# Altium PCB battery_board.PcbDoc
Units mil, origin at the board's own origin, x right, y up, seen from the top; angles counter-clockwise.
Board outline 4133.86 x 1811.02 mil, 2 copper layers (Top Layer, Bottom Layer); 6 components, 4 nets, 14 pads, 0 vias.
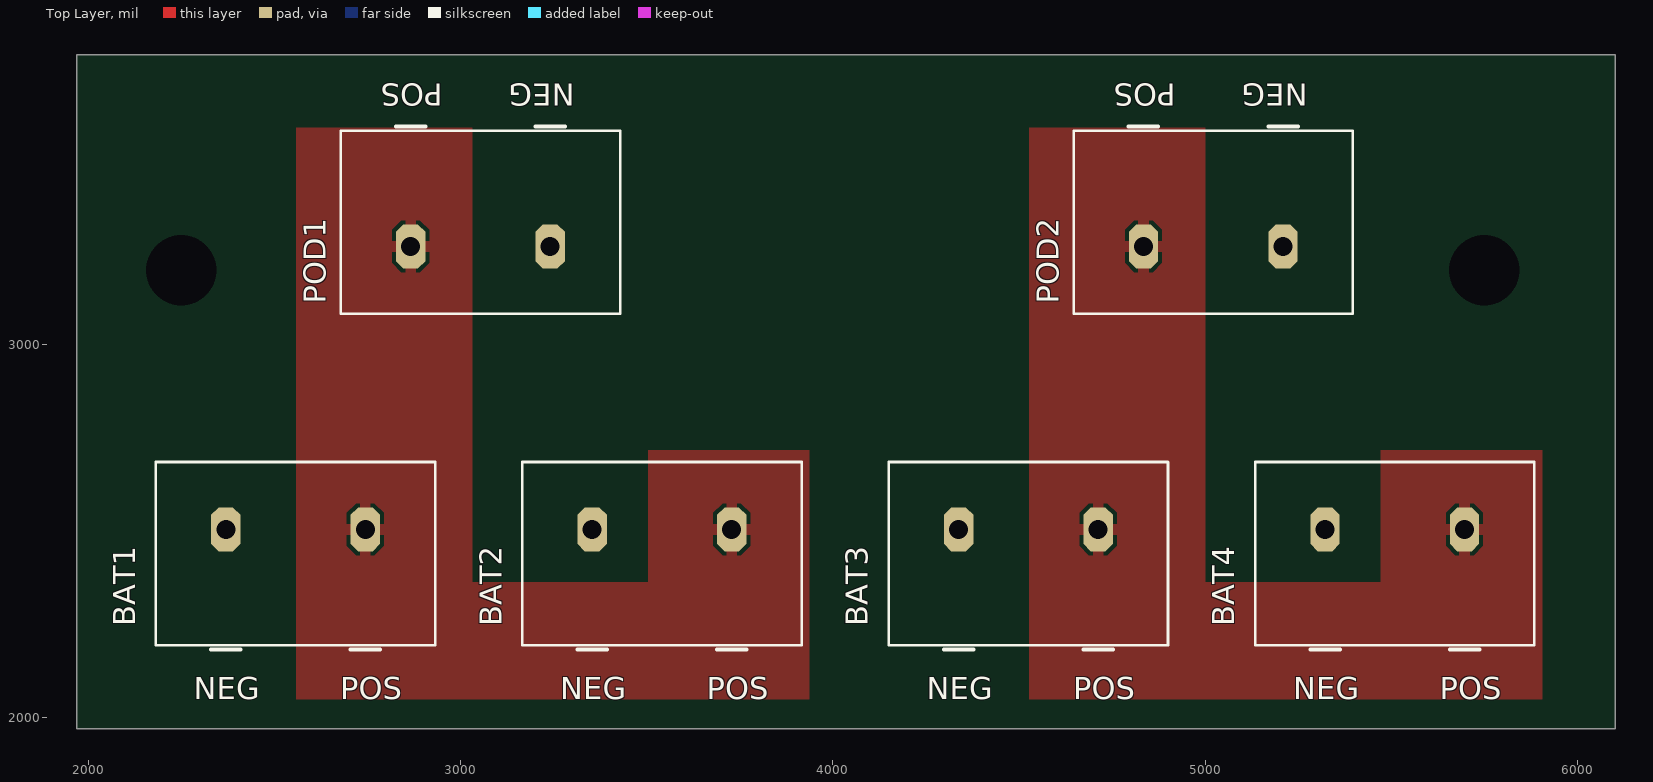
[diagram p0: Top Layer view]
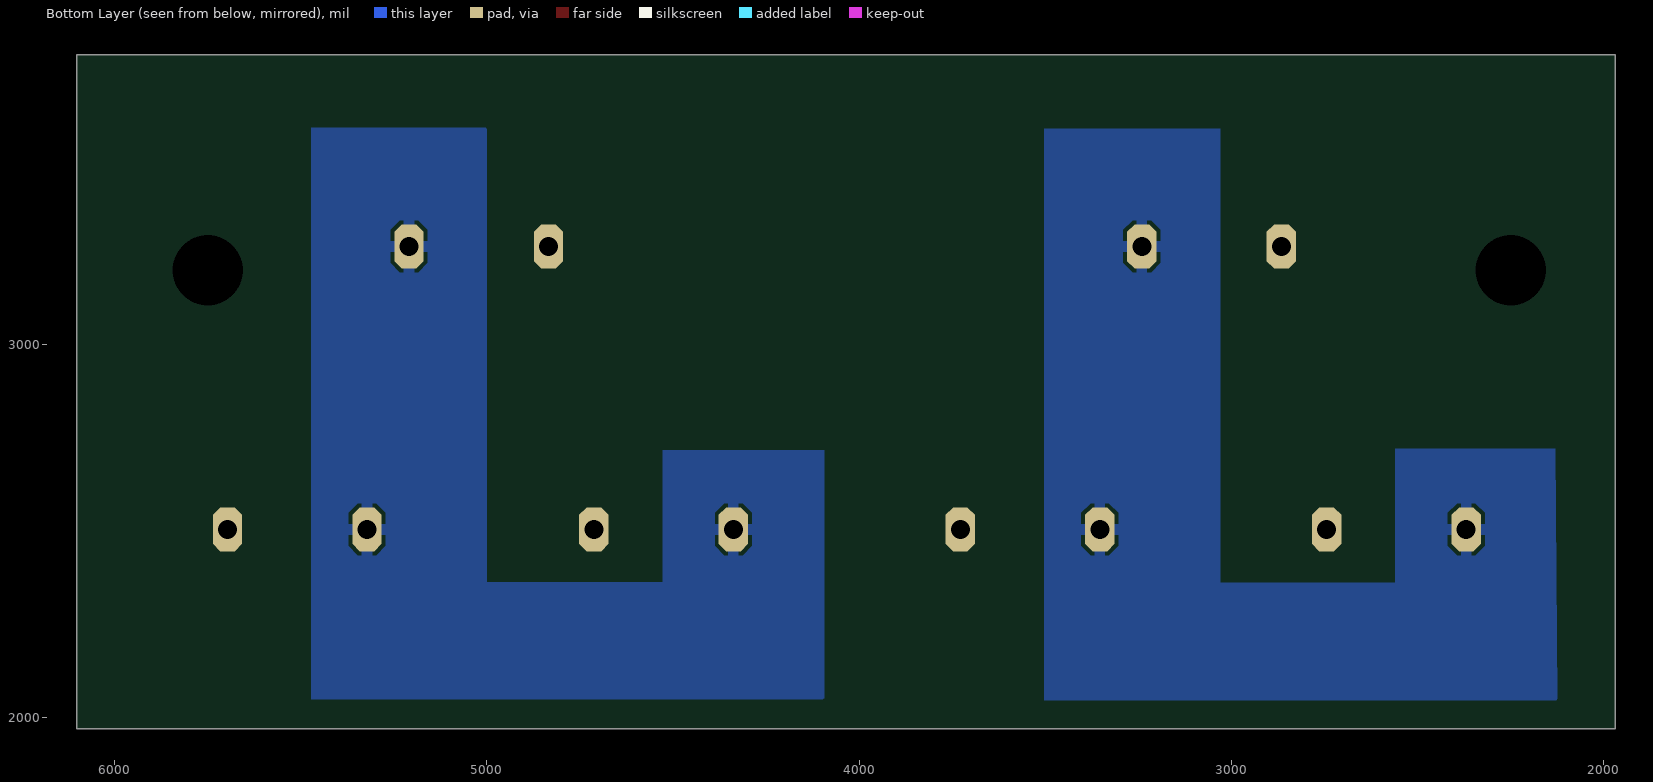
[diagram p1: Bottom Layer view, seen from below]
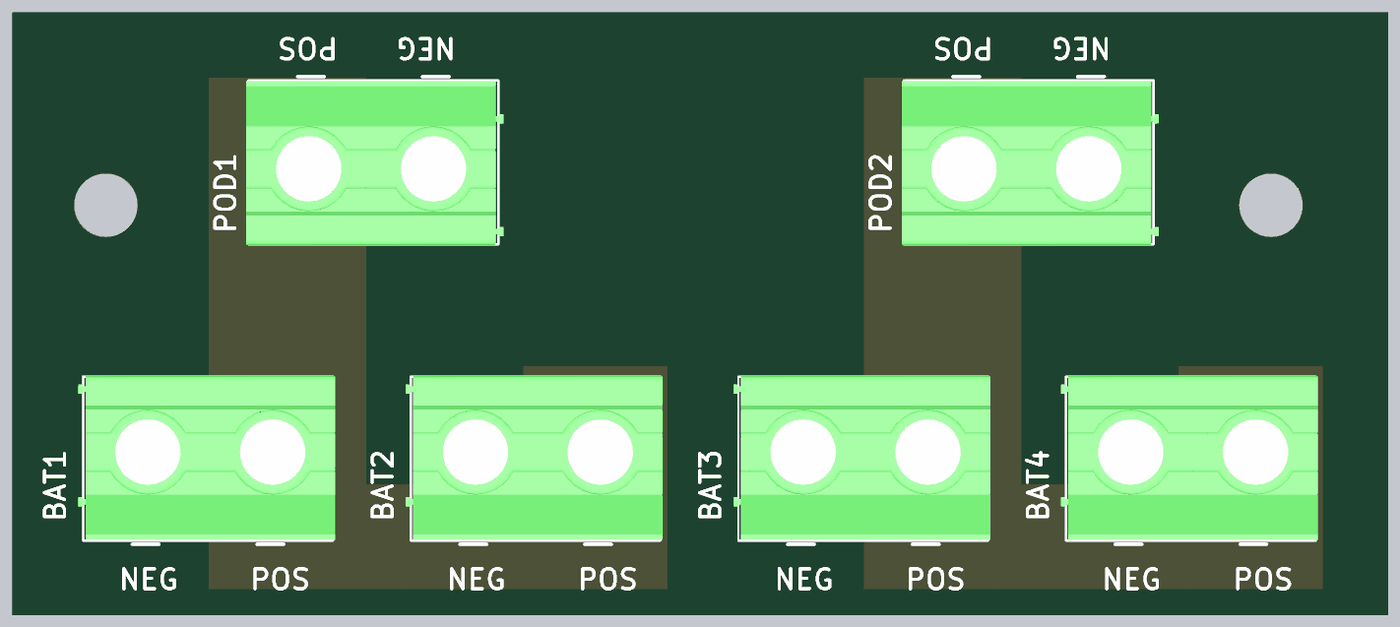
[diagram p2: 3D render of the assembled board from above, using the file's embedded part models]

## Layer stack, top to bottom
Top Layer: signal copper 2.8
Dielectric: core 12.6, FR-4, Dk 4.8
Bottom Layer: signal copper 2.8

## Board outline
1968.5,1968.5 1968.5,3779.53 6102.36,3779.53 6102.36,1968.5 1968.5,1968.5

## Design rules (kind name [scope] priority, off if disabled: settings)
Clearance [All] p1: gap=10
PolygonConnect [All] p1: connectstyle=Relief reliefconductorwidth=30 reliefentries=4 polygonreliefangle="90 Angle"
RoomDefinition battery_board [InComponentClass('battery_board')] p1: confinementstyle=ConfineIn formatcopy=TRUE lockcomponents=FALSE outline 1850.39,1889.76 6181.1,1889.76 6181.1,3897.64 1850.39,3897.64
RoutingVias [All] p1: holewidth=28 width=50 viastyle="Through Hole" minholewidth=28 minwidth=50 maxholewidth=28 maxwidth=50
SilkscreenOverComponentPads [All] p1: minsilkscreentomaskgap=10
SolderMaskExpansion [All] p1: expansion=4
TestPointUsage [All] p1: valid=0 allowmultiple=FALSE
Testpoint [All] p1: side=15 testpointundercomponent=TRUE minsize=40 maxsize=100 preferedsize=60 minholesize=0 maxholesize=40 preferedholesize=32 testpointgrid=1 style=1023 order=0-112345678
Width [All] p1: maxlimit=100 minlimit=10 preferedwidth=10 minimp=50.000000 maximp=50.000000 favimp=50.000000
23 further rules are at their usual default settings.

## Components (designator, comment, footprint, x,y, rotation, side; value= is the part's Value field where it differs from the comment)
BAT1 "1714971" 1714971 2559.06,2381.89 r180 top (schematic designator CON1)
BAT2 "1714971" 1714971 3543.31,2381.89 r180 top (schematic designator CON2)
BAT3 "1714971" 1714971 4527.56,2381.89 r180 top (schematic designator CON3)
BAT4 "1714971" 1714971 5511.81,2381.89 r180 top (schematic designator CON4)
POD1 "1714971" 1714971 3051.18,3385.83 r0 top (schematic designator CON5)
POD2 "1714971" 1714971 5019.69,3385.83 r0 top (schematic designator CON6)

## Footprints (in the part's own frame and the unit in brackets; to place one, negate y for a bottom-side part, rotate by r counter-clockwise, add the part's x,y. Pads: shape width x height; smd on the part's side, far side on the other; paste and mask are expansions set on the pad)
1714971 [mm] "2 position screw terminal block 30A"
  oct 2x3 hole 1.3: 1(-4.703,-3.096) 2(4.817,-3.096)
  silkscreen extent -9.47,-7.7 9.59,5.09, body extent -9.63,-7.74 9.98,4.76, height 21.5

## Part data
BAT1 BAT2 BAT3 BAT4 POD1 POD2: "2 position screw terminal block 30A"

## Free pads (board coordinates)
  round 130 hole 190: 1(2250,3200) 2(5750,3200)

## Nets (pads, with @x,y where several pads share a name; then routed paths per layer and width w, separated by ;. In a path a pad name is that pad's centre, name@x,y a point inside that pad or via, vN(x,y) a via of type N, cw(c..) or ccw(c..) an arc to the next point about the centre after c; other vN are vias at no path point)
MOL_GND1: BAT1.2 BAT2.2 POD1.2 | length 4.7
  Bottom Layer w10: BAT1.2 BAT1.2@2372.72,2507.09
MOL_GND2: BAT3.2 BAT4.2 POD2.2
MOL_PWR1: BAT1.1 BAT2.1 POD1.1 | length 1.7
  Top Layer w10: BAT2.1@3727.24,2505 BAT2.1
MOL_PWR2: BAT3.1 BAT4.1 POD2.1 | length 7
  Top Layer w10: POD2.1@4832.8,3262.2 POD2.1 ; BAT4.1@5693.78,2506.97 BAT4.1

## Polygon pours and split planes (outlines as drawn)
MOL_PWR2 on Top Layer "Bottom Layer-No Net" (solid, pour order 1000): 4527.56,3582.68 5000,3582.68 5000,2362.2 5472.44,2362.2 5472.44,2716.54 5905.51,2716.54 5905.51,2047.24 4527.56,2047.24
MOL_PWR1 on Top Layer "Bottom Layer-No Net" (solid, pour order 1000): 2559.06,3582.68 3031.5,3582.68 3031.5,2362.2 3503.94,2362.2 3503.94,2716.54 3937.01,2716.54 3937.01,2047.24 2559.06,2047.24
MOL_GND2 on Bottom Layer "Bottom Layer-No Net" (solid, pour order 1003): 5000,3582.68 5472.44,3582.68 5472.44,2047.24 4094.49,2047.24 4094.49,2716.54 4527.56,2716.54 4527.56,2362.2 5000,2362.2
MOL_GND1 on Bottom Layer "Bottom Layer-No Net" (solid, pour order 1003): 3030,3580.55 3502.44,3580.55 3502.44,2045.12 2124.49,2045.12 2130,2720 2560,2720 2560,2360 3030,2360

## Silkscreen, mask and mechanical layers (free items; w line width, h text height)
Top Overlay:
  text "POS" at 2952.76,3700.79 h60 r180
  text "NEG" at 3307.09,3700.79 h60 r180
  text "POS" at 4921.26,3700.79 h60 r180
  text "NEG" at 5275.59,3700.79 h60 r180
  text "NEG" at 2283.46,2047.24 h60
  text "POS" at 2677.17,2047.24 h60
  text "NEG" at 3267.72,2047.24 h60
  text "POS" at 3661.42,2047.24 h60
  text "NEG" at 4251.97,2047.24 h60
  text "POS" at 4645.67,2047.24 h60
  text "NEG" at 5236.22,2047.24 h60
  text "POS" at 5629.92,2047.24 h60
Mechanical 9:
  the board outline again, w10
  text "Fab as a 33 dollar each board" at 1950,1750 h60